# Altium PCB pqxSheetPCB.PcbDoc
Units mm, origin at the board's own origin, x right, y up, seen from the top; angles counter-clockwise.
Board outline 315 x 152 mm, 2 copper layers (Top Layer, Bottom Layer); 119 components, 182 nets, 649 pads, 0 vias.
Unrouted connection lines stored in the file: 432.
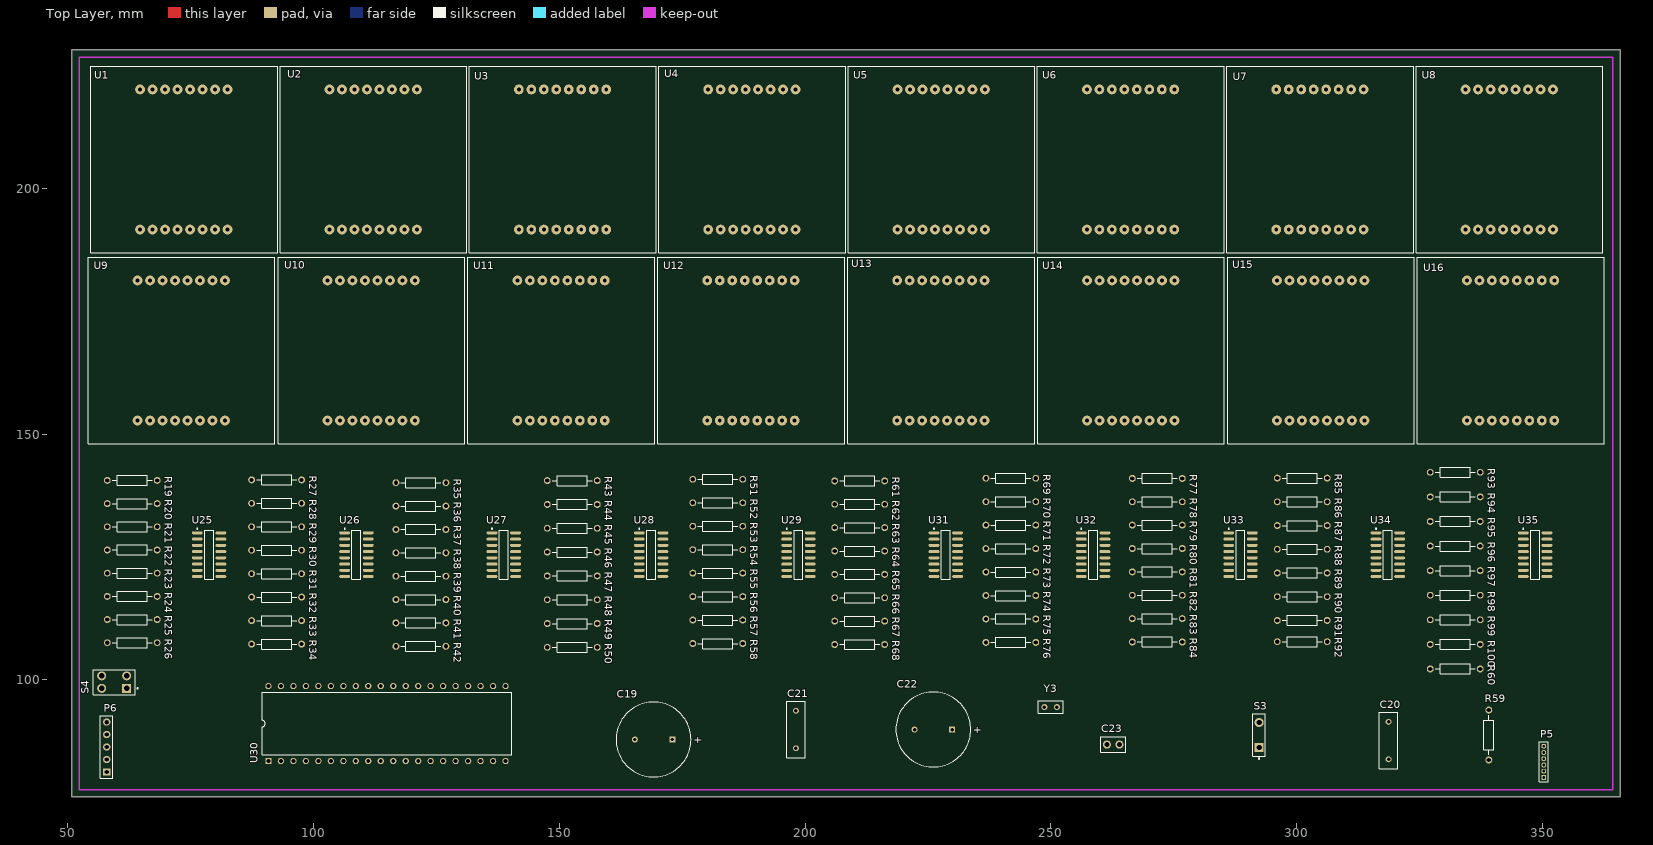
[diagram p0: Top Layer view]
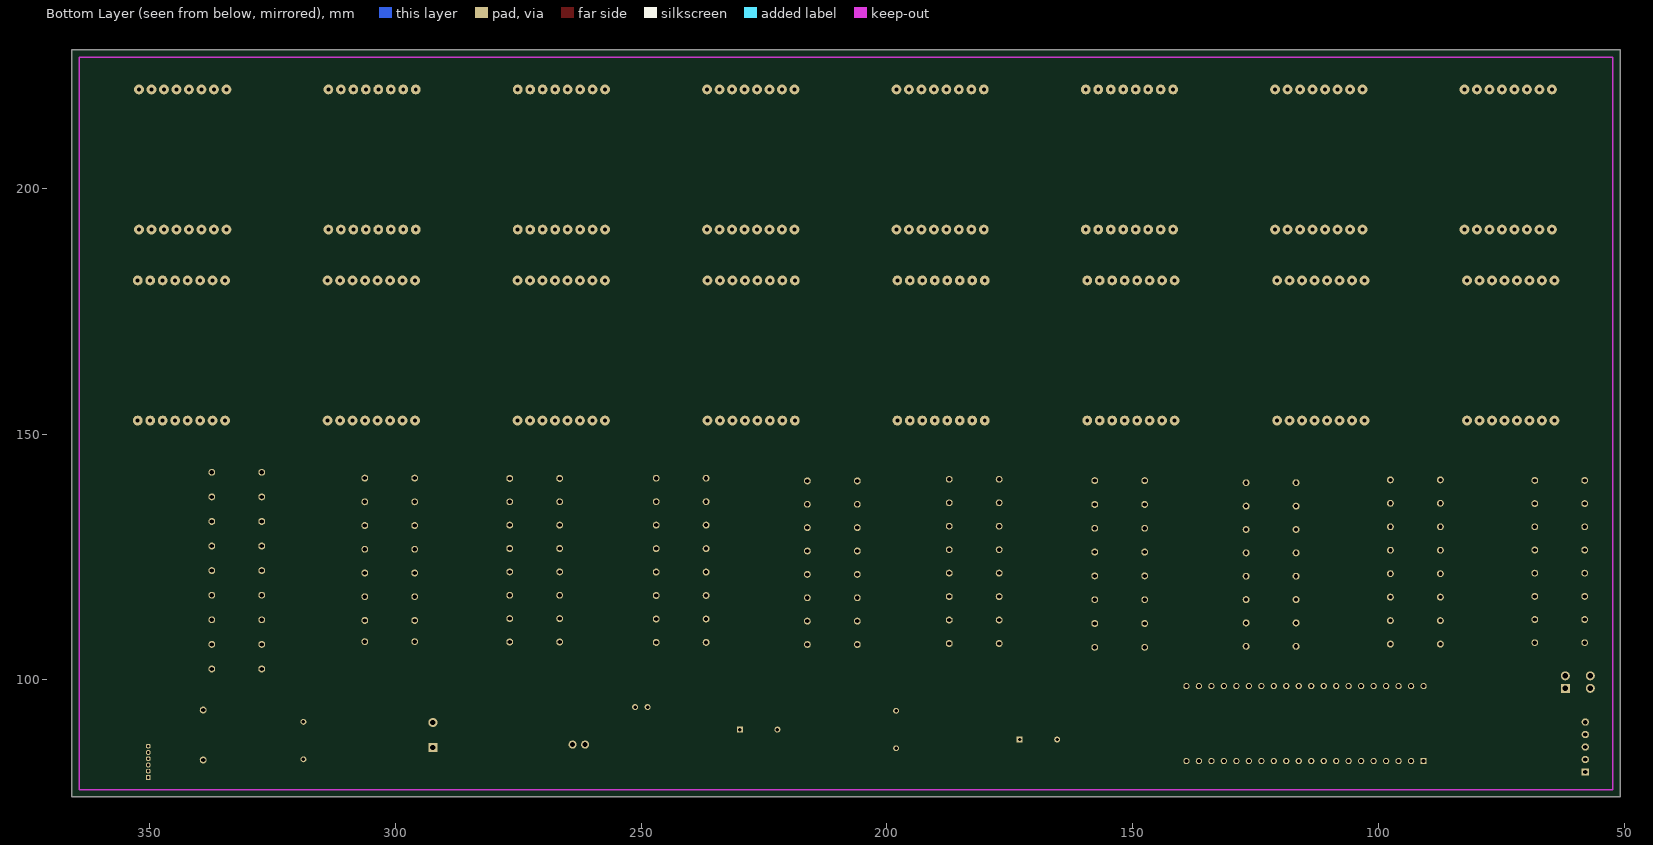
[diagram p1: Bottom Layer view, seen from below]

## Layer stack, top to bottom
Top Layer: signal copper 0.0356
Dielectric: dielectric 0.32, FR-4, Dk 4.8
Bottom Layer: signal copper 0.0356

## Board outline
50.8,76.2 365.8,76.2 365.8,228.2 50.8,228.2

## Design rules (kind name [scope] priority, off if disabled: settings)
Clearance [All] p1: gap=0.3
PolygonConnect [All] p1: connectstyle=Relief reliefconductorwidth=0.254 reliefentries=4 polygonreliefangle="90 Angle"
RoomDefinition pqxProbjSheet [InComponentClass('pqxProbjSheet')] p1: confinementstyle=ConfineIn formatcopy=TRUE lockcomponents=FALSE outline 364.3,226.7 364.3,77.7 52.3,77.7 52.3,226.7
RoutingVias [All] p1: holewidth=0.8 width=1.6 viastyle="Through Hole" minholewidth=0.711 minwidth=1.27 maxholewidth=0.711 maxwidth=1.27
SilkscreenOverComponentPads [All] p1: minsilkscreentomaskgap=0.254
SolderMaskExpansion [All] p1: expansion=0.102
TestPointUsage [All] p1: valid=0 allowmultiple=FALSE
Testpoint [All] p1: side=15 testpointundercomponent=TRUE minsize=1.016 maxsize=2.54 preferedsize=1.524 minholesize=0 maxholesize=1.016 preferedholesize=0.813 testpointgrid=0.025 style=1023 order=0-112345678
Width [All] p1: maxlimit=0.3 minlimit=0.3 preferedwidth=0.3
23 further rules are at their usual default settings.

## Components (designator, comment, footprint, x,y, rotation, side; value= is the part's Value field where it differs from the comment)
C19 "Cap Pol1" RB7.6-15 169.164,87.884 r0 top (schematic designator C1)
C20 "Cap" RAD-0.3 318.664,87.67 r90 top (schematic designator C2)
C21 "Cap" RAD-0.3 198.12,89.916 r90 top (schematic designator C3)
C22 "Cap Pol1" RB7.6-15 226.06,89.916 r0 top (schematic designator C4)
C23 "Cap" VP32-3.2 262.636,86.868 r0 top (schematic designator C5)
P5 "MHDR1X6" MHDR1X6 350.234,80.166 r90 top (schematic designator P1)
P6 "USB" HDR1X5 57.912,81.28 r90 top (schematic designator P2)
R19 "Res2" AXIAL-0.4 63.112,140.592 r0 top (schematic designator R1)
R20 "Res2" AXIAL-0.4 63.112,135.875 r0 top (schematic designator R2)
R21 "Res2" AXIAL-0.4 63.112,131.158 r0 top (schematic designator R3)
R22 "Res2" AXIAL-0.4 63.112,126.441 r0 top (schematic designator R4)
R23 "Res2" AXIAL-0.4 63.112,121.723 r0 top (schematic designator R5)
R24 "Res2" AXIAL-0.4 63.112,117.006 r0 top (schematic designator R6)
R25 "Res2" AXIAL-0.4 63.112,112.289 r0 top (schematic designator R7)
R26 "Res2" AXIAL-0.4 63.112,107.572 r0 top (schematic designator R8)
R27 "Res2" AXIAL-0.4 92.478,140.704 r0 top (schematic designator R9)
R28 "Res2" AXIAL-0.4 92.478,135.932 r0 top (schematic designator R10)
R29 "Res2" AXIAL-0.4 92.478,131.161 r0 top (schematic designator R11)
R30 "Res2" AXIAL-0.4 92.478,126.389 r0 top (schematic designator R12)
R31 "Res2" AXIAL-0.4 92.478,121.618 r0 top (schematic designator R13)
R32 "Res2" AXIAL-0.4 92.478,116.846 r0 top (schematic designator R14)
R33 "Res2" AXIAL-0.4 92.478,112.075 r0 top (schematic designator R15)
R34 "Res2" AXIAL-0.4 92.478,107.303 r0 top (schematic designator R16)
R35 "Res2" AXIAL-0.4 121.828,140.119 r0 top (schematic designator R17)
R36 "Res2" AXIAL-0.4 121.828,135.366 r0 top (schematic designator R18)
R37 "Res2" AXIAL-0.4 121.828,130.612 r0 top (schematic designator R19)
R38 "Res2" AXIAL-0.4 121.828,125.859 r0 top (schematic designator R20)
R39 "Res2" AXIAL-0.4 121.828,121.105 r0 top (schematic designator R21)
R40 "Res2" AXIAL-0.4 121.828,116.352 r0 top (schematic designator R22)
R41 "Res2" AXIAL-0.4 121.828,111.598 r0 top (schematic designator R23)
R42 "Res2" AXIAL-0.4 121.828,106.845 r0 top (schematic designator R24)
R43 "Res2" AXIAL-0.4 152.62,140.547 r0 top (schematic designator R25)
R44 "Res2" AXIAL-0.4 152.62,135.703 r0 top (schematic designator R26)
R45 "Res2" AXIAL-0.4 152.62,130.859 r0 top (schematic designator R27)
R46 "Res2" AXIAL-0.4 152.62,126.015 r0 top (schematic designator R28)
R47 "Res2" AXIAL-0.4 152.62,121.17 r0 top (schematic designator R29)
R48 "Res2" AXIAL-0.4 152.62,116.326 r0 top (schematic designator R30)
R49 "Res2" AXIAL-0.4 152.62,111.482 r0 top (schematic designator R31)
R50 "Res2" AXIAL-0.4 152.62,106.638 r0 top (schematic designator R32)
R51 "Res2" AXIAL-0.4 182.22,140.816 r0 top (schematic designator R33)
R52 "Res2" AXIAL-0.4 182.22,136.044 r0 top (schematic designator R34)
R53 "Res2" AXIAL-0.4 182.22,131.273 r0 top (schematic designator R35)
R54 "Res2" AXIAL-0.4 182.22,126.501 r0 top (schematic designator R36)
R55 "Res2" AXIAL-0.4 182.22,121.73 r0 top (schematic designator R37)
R56 "Res2" AXIAL-0.4 182.22,116.958 r0 top (schematic designator R38)
R57 "Res2" AXIAL-0.4 182.22,112.187 r0 top (schematic designator R39)
R58 "Res2" AXIAL-0.4 182.22,107.415 r0 top (schematic designator R40)
R59 "Res2" AXIAL-0.4 339.058,88.802 r90 top (schematic designator R41)
R60 "Res2" AXIAL-0.4 332.225,102.239 r0 top (schematic designator R42)
R61 "Res2" AXIAL-0.4 211.085,140.488 r0 top (schematic designator R43)
R62 "Res2" AXIAL-0.4 211.085,135.735 r0 top (schematic designator R44)
R63 "Res2" AXIAL-0.4 211.085,130.981 r0 top (schematic designator R45)
R64 "Res2" AXIAL-0.4 211.085,126.228 r0 top (schematic designator R46)
R65 "Res2" AXIAL-0.4 211.085,121.474 r0 top (schematic designator R47)
R66 "Res2" AXIAL-0.4 211.085,116.721 r0 top (schematic designator R48)
R67 "Res2" AXIAL-0.4 211.085,111.967 r0 top (schematic designator R49)
R68 "Res2" AXIAL-0.4 211.085,107.214 r0 top (schematic designator R50)
R69 "Res2" AXIAL-0.4 241.827,141.036 r0 top (schematic designator R51)
R70 "Res2" AXIAL-0.4 241.827,136.264 r0 top (schematic designator R52)
R71 "Res2" AXIAL-0.4 241.827,131.493 r0 top (schematic designator R53)
R72 "Res2" AXIAL-0.4 241.827,126.721 r0 top (schematic designator R54)
R73 "Res2" AXIAL-0.4 241.827,121.95 r0 top (schematic designator R55)
R74 "Res2" AXIAL-0.4 241.827,117.178 r0 top (schematic designator R56)
R75 "Res2" AXIAL-0.4 241.827,112.407 r0 top (schematic designator R57)
R76 "Res2" AXIAL-0.4 241.827,107.635 r0 top (schematic designator R58)
R77 "Res2" AXIAL-0.4 271.621,140.997 r0 top (schematic designator R59)
R78 "Res2" AXIAL-0.4 271.621,136.244 r0 top (schematic designator R60)
R79 "Res2" AXIAL-0.4 271.621,131.49 r0 top (schematic designator R61)
R80 "Res2" AXIAL-0.4 271.621,126.737 r0 top (schematic designator R62)
R81 "Res2" AXIAL-0.4 271.621,121.983 r0 top (schematic designator R63)
R82 "Res2" AXIAL-0.4 271.621,117.23 r0 top (schematic designator R64)
R83 "Res2" AXIAL-0.4 271.621,112.476 r0 top (schematic designator R65)
R84 "Res2" AXIAL-0.4 271.621,107.723 r0 top (schematic designator R66)
R85 "Res2" AXIAL-0.4 301.107,141.064 r0 top (schematic designator R67)
R86 "Res2" AXIAL-0.4 301.107,136.238 r0 top (schematic designator R68)
R87 "Res2" AXIAL-0.4 301.107,131.412 r0 top (schematic designator R69)
R88 "Res2" AXIAL-0.4 301.107,126.586 r0 top (schematic designator R70)
R89 "Res2" AXIAL-0.4 301.107,121.76 r0 top (schematic designator R71)
R90 "Res2" AXIAL-0.4 301.107,116.934 r0 top (schematic designator R72)
R91 "Res2" AXIAL-0.4 301.107,112.108 r0 top (schematic designator R73)
R92 "Res2" AXIAL-0.4 301.107,107.79 r0 top (schematic designator R74)
R93 "Res2" AXIAL-0.4 332.225,142.244 r0 top (schematic designator R75)
R94 "Res2" AXIAL-0.4 332.225,137.243 r0 top (schematic designator R76)
R95 "Res2" AXIAL-0.4 332.225,132.243 r0 top (schematic designator R77)
R96 "Res2" AXIAL-0.4 332.225,127.242 r0 top (schematic designator R78)
R97 "Res2" AXIAL-0.4 332.225,122.241 r0 top (schematic designator R79)
R98 "Res2" AXIAL-0.4 332.225,117.241 r0 top (schematic designator R80)
R99 "Res2" AXIAL-0.4 332.225,112.24 r0 top (schematic designator R81)
R100 "Res2" AXIAL-0.4 332.225,107.24 r0 top (schematic designator R82)
S3 "SW-PB" SPST-2 292.322,88.802 r90 top (schematic designator S1)
S4 "SW-DPST" DPST-4 59.436,99.568 r180 top (schematic designator S2)
U1 "1588BS" 1588BS_16Pin 73.66,205.867 r0 top
U2 "1588BS" 1588BS_16Pin 112.177,205.867 r0 top
U3 "1588BS" 1588BS_16Pin 150.695,205.867 r0 top
U4 "1588BS" 1588BS_16Pin 189.212,205.867 r0 top
U5 "1588BS" 1588BS_16Pin 227.729,205.867 r0 top
U6 "1588BS" 1588BS_16Pin 266.246,205.867 r0 top
U7 "1588BS" 1588BS_16Pin 304.764,205.867 r0 top
U8 "1588BS" 1588BS_16Pin 343.281,205.867 r0 top
U9 "1588BS" 1588BS_16Pin 73.138,167.022 r0 top
U10 "1588BS" 1588BS_16Pin 111.768,167.022 r0 top
U11 "1588BS" 1588BS_16Pin 150.397,167.022 r0 top
U12 "1588BS" 1588BS_16Pin 189.027,167.022 r0 top
U13 "1588BS" 1588BS_16Pin 227.657,167.022 r0 top
U14 "1588BS" 1588BS_16Pin 266.287,167.022 r0 top
U15 "1588BS" 1588BS_16Pin 304.916,167.022 r0 top
U16 "1588BS" 1588BS_16Pin 343.546,167.022 r0 top
U25 "SN74HC594D" D016_N 78.74,125.486 r0 top (schematic designator U17)
U26 "SN74HC594D" D016_N 108.712,125.486 r0 top (schematic designator U18)
U27 "SN74HC594D" D016_N 138.684,125.486 r0 top (schematic designator U19)
U28 "SN74HC594D" D016_N 168.656,125.486 r0 top (schematic designator U20)
U29 "SN74HC594D" D016_N 198.628,125.486 r0 top (schematic designator U21)
U30 "AT89C51" DIP40 113.792,90.932 r90 top (schematic designator U22)
U31 "SN74HC594D" D016_N 228.6,125.486 r0 top (schematic designator U23)
U32 "SN74HC594D" D016_N 258.572,125.486 r0 top (schematic designator U24)
U33 "SN74HC594D" D016_N 288.544,125.486 r0 top (schematic designator U25)
U34 "SN74HC594D" D016_N 318.516,125.486 r0 top (schematic designator U26)
U35 "SN74HC594D" D016_N 348.488,125.486 r0 top (schematic designator U27)
Y3 "XTAL" RAD-0.1 249.936,94.488 r0 top (schematic designator Y1)

## Footprints (in the part's own frame and the unit in brackets; to place one, negate y for a bottom-side part, rotate by r counter-clockwise, add the part's x,y. Pads: shape width x height; smd on the part's side, far side on the other; paste and mask are expansions set on the pad)
1588BS_16Pin [mm]
  round 2 hole 0.8: 1(-8.947,14.25) 2(-6.407,14.25) 3(-3.867,14.25) 4(-1.327,14.25) 5(1.213,14.25) 6(3.753,14.25) 7(6.293,14.25) 8(8.833,14.25) 9(8.833,-14.25) 10(6.293,-14.25) 11(3.753,-14.25) 12(1.213,-14.25) 13(-1.327,-14.25) 14(-3.867,-14.25) 15(-6.407,-14.25) 16(-8.947,-14.25)
  silkscreen extent -19,-19 19,19
AXIAL-0.4 [mm] "Resistor; 2 Leads"
  round 1.4 hole 0.85: 1(-5.08,0) 2(5.08,0)
  silkscreen extent -4.06,-1.02 4.06,1.02
D016_N [mm] "SOIC, 16-Leads, Body 9.9x3.9mm, Pitch 1.27mm, IPC Medium Density"
  oval 2.2x0.6 smd: 1(-2.4,4.445) 2(-2.4,3.175) 3(-2.4,1.905) 4(-2.4,0.635) 5(-2.4,-0.635) 6(-2.4,-1.905) 7(-2.4,-3.175) 8(-2.4,-4.445) 9(2.4,-4.445) 10(2.4,-3.175) 11(2.4,-1.905) 12(2.4,-0.635) 13(2.4,0.635) 14(2.4,1.905) 15(2.4,3.175) 16(2.4,4.445)
  silkscreen extent -2.52,-5 0.9,5.42, body extent -1.95,-4.95 1.95,4.95, height 1.75
DIP40 [mm]
  rect 1.27x1.27 hole 0.8: 1(-7.422,22.99)
  round 1.27 hole 0.8: 2(-7.422,20.45) 3(-7.422,17.91) 4(-7.422,15.37) 5(-7.422,12.83) 6(-7.422,10.29) 7(-7.422,7.75) 8(-7.422,5.21) 9(-7.422,2.67) 10(-7.422,0.13) 11(-7.422,-2.41) 12(-7.422,-4.95) 13(-7.422,-7.49) 14(-7.422,-10.03) 15(-7.422,-12.57) 16(-7.422,-15.11) 17(-7.422,-17.65) 18(-7.422,-20.19) 19(-7.422,-22.73) 20(-7.422,-25.27) 21(7.818,-25.27) 22(7.818,-22.73) 23(7.818,-20.19) 24(7.818,-17.65) 25(7.818,-15.11) 26(7.818,-12.57) 27(7.818,-10.03) 28(7.818,-7.49) 29(7.818,-4.95) 30(7.818,-2.41) 31(7.818,0.13) 32(7.818,2.67) 33(7.818,5.21) 34(7.818,7.75) 35(7.818,10.29) 36(7.818,12.83) 37(7.818,15.37) 38(7.818,17.91) 39(7.818,20.45) 40(7.818,22.99)
  silkscreen extent -6.15,-26.54 6.55,24.26
DPST-4 [mm] "Double-Pole, Single-Throw Switch; 4 Leads"
  rect 1.85x1.85 hole 1.1: 1(-2.54,1.27)
  round 1.85 hole 1.1: 2(-2.54,-1.27) 3(2.54,-1.27) 4(2.54,1.27)
  silkscreen extent -4.88,-2.54 4.28,2.54
HDR1X5 [mm] "Connector; Header; 5 Position"
  rect 1.5x1.5 hole 0.9: 1(0,0)
  round 1.5 hole 0.9: 2(2.54,0) 3(5.08,0) 4(7.62,0) 5(10.16,0)
  silkscreen extent -1.27,-1.27 11.43,1.27
MHDR1X6 [mm] "Connector; Header; 6 Position"
  rect 1x1 hole 0.6: 1(0,0)
  round 1 hole 0.6: 2(1.27,0) 3(2.54,0) 4(3.81,0) 5(5.08,0) 6(6.35,0)
  silkscreen extent -0.9,-0.9 7.25,0.9
RAD-0.1 [mm] "Indicating Instrument; 2 Leads"
  round 1.2 hole 0.7: 1(-1.27,0) 2(1.27,0)
  silkscreen extent -2.54,-1.27 2.54,1.27
RAD-0.3 [mm] "Capacitor; 2 Leads"
  round 1.2 hole 0.7: 1(-3.81,0) 2(3.81,0)
  silkscreen extent -5.72,-1.9 5.71,1.91
RB7.6-15 [mm] "Polarized Capacitor (Radial); 2 Leads"
  rect 1.2x1.2 hole 0.7: 1(3.81,0)
  round 1.2 hole 0.7: 2(-3.81,0)
  silkscreen extent -7.62,-7.62 7.62,7.62
SPST-2 [mm] "Circuit Breaker; 2 Leads"
  rect 1.85x1.85 hole 1.1: 1(-2.54,0)
  round 1.85 hole 1.1: 2(2.54,0)
  silkscreen extent -4.89,-1.27 4.28,1.27
VP32-3.2 [mm] "Capacitor, Ceramic, Thru-Hole, Dipped Radial; Body 5.1 x 3.2 mm (WxT) Pin Spacing 2.54 mm (typ)"
  round 1.65 hole 1: 1(-1.27,0) 2(1.27,0)
  silkscreen extent -2.55,-1.6 2.55,1.6

## Part data
C19 C22: "Polarized Capacitor (Radial)"
C20 C21 C23: "Capacitor"
P5: "Header, 6-Pin"
P6: library part "Header 5H", "Header, 5-Pin, Right Angle"
R19 R20 R21 R22 R23 R24 R25 R26 R27 R28 R29 R30 R31 R32 R33 R34 R35 R36 R37 R38 R39 R40 R41 R42 R43 R44 R45 R46 R47 R48 R49 R50 R51 R52 R53 R54 R55 R56 R57 R58 R59 R60 R61 R62 R63 R64 R65 R66 R67 R68 R69 R70 R71 R72 R73 R74 R75 R76 R77 R78 R79 R80 R81 R82 R83 R84 R85 R86 R87 R88 R89 R90 R91 R92 R93 R94 R95 R96 R97 R98 R99 R100: "Resistor"
S3: "Switch"
S4: "Double-Pole, Single-Throw Switch"
U1 U2 U3 U4 U5 U6 U7 U8 U9 U10 U11 U12 U13 U14 U15 U16: library part 1588BS点阵
U25 U26 U27 U28 U29 U31 U32 U33 U34 U35: "8-Bit Shift Register with Output Registers"
U30: library part 89C51
Y3: "Crystal Oscillator"

## Nets (pads, with @x,y where several pads share a name; then routed paths per layer and width w, separated by ;. In a path a pad name is that pad's centre, name@x,y a point inside that pad or via, vN(x,y) a via of type N, cw(c..) or ccw(c..) an arc to the next point about the centre after c; other vN are vias at no path point)
+5V: C22.1 C23.1 P6.5 S4.1 S4.3
EN/CLR: P5.1
GND: C20.1 C21.1 C22.2 C23.2 P5.3 P6.1 R59.1 U25.8 U25.13 U26.8 U26.13 U27.8 U27.13 U28.8 U28.13 U29.8 U29.13 U30.20 U31.8 U31.13 U32.8 U32.13 U33.8 U33.13 U34.8 U34.13 U35.8 U35.13
NetC19_2: C19.2 R59.2 S3.1 U30.9
NetC20_2: C20.2 U30.18 Y3.2
NetC21_2: C21.2 U30.19 Y3.1
NetR19_1: R19.1 U25.15
NetR20_1: R20.1 U25.1
NetR21_1: R21.1 U25.2
NetR22_1: R22.1 U25.3
NetR23_1: R23.1 U25.4
NetR24_1: R24.1 U25.5
NetR25_1: R25.1 U25.6
NetR26_1: R26.1 U25.7
NetR27_1: R27.1 U26.15
NetR28_1: R28.1 U26.1
NetR29_1: R29.1 U26.2
NetR30_1: R30.1 U26.3
NetR31_1: R31.1 U26.4
NetR32_1: R32.1 U26.5
NetR33_1: R33.1 U26.6
NetR34_1: R34.1 U26.7
NetR35_1: R35.1 U27.15
NetR36_1: R36.1 U27.1
NetR37_1: R37.1 U27.2
NetR38_1: R38.1 U27.3
NetR39_1: R39.1 U27.4
NetR40_1: R40.1 U27.5
NetR41_1: R41.1 U27.6
NetR42_1: R42.1 U27.7
NetR43_1: R43.1 U28.15
NetR44_1: R44.1 U28.1
NetR45_1: R45.1 U28.2
NetR46_1: R46.1 U28.3
NetR47_1: R47.1 U28.4
NetR48_1: R48.1 U28.5
NetR49_1: R49.1 U28.6
NetR50_1: R50.1 U28.7
NetR51_1: R51.1 U29.15
NetR52_1: R52.1 U29.1
NetR53_1: R53.1 U29.2
NetR54_1: R54.1 U29.3
NetR55_1: R55.1 U29.4
NetR56_1: R56.1 U29.5
NetR57_1: R57.1 U29.6
NetR58_1: R58.1 U29.7
NetR60_2: R60.2 U30.31
NetR61_1: R61.1 U31.15
NetR62_1: R62.1 U31.1
NetR63_1: R63.1 U31.2
NetR64_1: R64.1 U31.3
NetR65_1: R65.1 U31.4
NetR66_1: R66.1 U31.5
NetR67_1: R67.1 U31.6
NetR68_1: R68.1 U31.7
NetR69_1: R69.1 U32.15
NetR70_1: R70.1 U32.1
NetR71_1: R71.1 U32.2
NetR72_1: R72.1 U32.3
NetR73_1: R73.1 U32.4
NetR74_1: R74.1 U32.5
NetR75_1: R75.1 U32.6
NetR76_1: R76.1 U32.7
NetR77_1: R77.1 U33.15
NetR78_1: R78.1 U33.1
NetR79_1: R79.1 U33.2
NetR80_1: R80.1 U33.3
NetR81_1: R81.1 U33.4
NetR82_1: R82.1 U33.5
NetR83_1: R83.1 U33.6
NetR84_1: R84.1 U33.7
NetR85_1: R85.1 U34.15
NetR86_1: R86.1 U34.1
NetR87_1: R87.1 U34.2
NetR88_1: R88.1 U34.3
NetR89_1: R89.1 U34.4
NetR90_1: R90.1 U34.5
NetR91_1: R91.1 U34.6
NetR92_1: R92.1 U34.7
NetR93_1: R93.1 U35.15
NetR94_1: R94.1 U35.1
NetR95_1: R95.1 U35.2
NetR96_1: R96.1 U35.3
NetR97_1: R97.1 U35.4
NetR98_1: R98.1 U35.5
NetR99_1: R99.1 U35.6
NetR100_1: R100.1 U35.7
P0.0: U25.12 U26.12 U27.12 U28.12 U29.12 U30.39 U31.12 U32.12 U33.12 U34.12 U35.12
P0.1: U25.11 U26.11 U27.11 U28.11 U29.11 U30.38 U31.11 U32.11 U33.11 U34.11 U35.11
P0.2: U30.37 U35.14
RXD: P5.5 U30.10
SER1: U34.14 U35.9
SER2: U33.14 U34.9
SER3: U32.14 U33.9
SER4: U31.14 U32.9
SER5: U29.14 U31.9
SER6: U28.14 U29.9
SER7: U27.14 U28.9
SER8: U26.14 U27.9
SER9: U25.14 U26.9
STATE: P5.6
TXD: P5.4 U30.11
VCC: C19.1 P5.2 R60.1 S3.2 S4.2 S4.4 U25.10 U25.16 U26.10 U26.16 U27.10 U27.16 U28.10 U28.16 U29.10 U29.16 U31.10 U31.16 U32.10 U32.16 U33.10 U33.16 U34.10 U34.16 U35.10 U35.16
X0: R93.2 U8.16 U16.16
X1: R94.2 U8.15 U16.15
X2: R95.2 U8.11 U16.11
X3: R96.2 U8.6 U16.6
X4: R97.2 U8.10 U16.10
X5: R98.2 U8.4 U16.4
X6: R99.2 U8.3 U16.3
X7: R100.2 U8.13 U16.13
X8: R85.2 U7.16 U15.16
X9: R86.2 U7.15 U15.15
X10: R87.2 U7.11 U15.11
X11: R88.2 U7.6 U15.6
X12: R89.2 U7.10 U15.10
X13: R90.2 U7.4 U15.4
X14: R91.2 U7.3 U15.3
X15: R92.2 U7.13 U15.13
X16: R77.2 U6.16 U14.16
X17: R78.2 U6.15 U14.15
X18: R79.2 U6.11 U14.11
X19: R80.2 U6.6 U14.6
X20: R81.2 U6.10 U14.10
X21: R82.2 U6.4 U14.4
X22: R83.2 U6.3 U14.3
X23: R84.2 U6.13 U14.13
X24: R69.2 U5.16 U13.16
X25: R70.2 U5.15 U13.15
X26: R72.2 U5.6 U5.11 U13.6 U13.11
X28: R73.2 U5.10 U13.10
X29: R74.2 U5.4 U13.4
X30: R75.2 U5.3 U13.3
X31: R76.2 U5.13 U13.13
X32: R61.2 U4.16 U12.16
X33: R62.2 U4.15 U12.15
X34: R63.2 U4.11 U12.11
X35: R64.2 U4.6 U12.6
X36: R65.2 U4.10 U12.10
X37: R66.2 U4.4 U12.4
X38: R67.2 U4.3 U12.3
X39: R68.2 U4.13 U12.13
X40: R51.2 U3.16 U11.16
X41: R52.2 U3.15 U11.15
X42: R53.2 U3.11 U11.11
X43: R54.2 U3.6 U11.6
X44: R55.2 U3.10 U11.10
X45: R56.2 U3.4 U11.4
X46: R57.2 U3.3 U11.3
X47: R58.2 U3.13 U11.13
X48: R43.2 U2.16 U10.16
X49: R44.2 U2.15 U10.15
X50: R45.2 U2.11 U10.11
X51: R46.2 U2.6 U10.6
X52: R47.2 U2.10 U10.10
X53: R48.2 U2.4 U10.4
X54: R49.2 U2.3 U10.3
X55: R50.2 U2.13 U10.13
X56: R35.2 U1.16 U9.16
X57: R36.2 U1.15 U9.15
X58: R37.2 U1.11 U9.11
X59: R38.2 U1.6 U9.6
X60: R39.2 U1.10 U9.10
X61: R40.2 U1.4 U9.4
X62: R41.2 U1.3 U9.3
X63: R42.2 U1.13 U9.13
Y0: R27.2 U9.5 U10.5 U11.5 U12.5 U13.5 U14.5 U15.5 U16.5
Y1: R28.2 U9.2 U10.2 U11.2 U12.2 U13.2 U14.2 U15.2 U16.2
Y2: R29.2 U9.7 U10.7 U11.7 U12.7 U13.7 U14.7 U15.7 U16.7
Y3: R30.2 U9.1 U10.1 U11.1 U12.1 U13.1 U14.1 U15.1 U16.1
Y4: R31.2 U9.12 U10.12 U11.12 U12.12 U13.12 U14.12 U15.12 U16.12
Y5: R32.2 U9.8 U10.8 U11.8 U12.8 U13.8 U14.8 U15.8 U16.8
Y6: R33.2 U9.14 U10.14 U11.14 U12.14 U13.14 U14.14 U15.14 U16.14
Y7: R34.2 U9.9 U10.9 U11.9 U12.9 U13.9 U14.9 U15.9 U16.9
Y8: R19.2 U1.5 U2.5 U3.5 U4.5 U5.5 U6.5 U7.5 U8.5
Y9: R20.2 U1.2 U2.2 U3.2 U4.2 U5.2 U6.2 U7.2 U8.2
Y10: R21.2 U1.7 U2.7 U3.7 U4.7 U5.7 U6.7 U7.7 U8.7
Y11: R22.2 U1.1 U2.1 U3.1 U4.1 U5.1 U6.1 U7.1 U8.1
Y12: R23.2 U1.12 U2.12 U3.12 U4.12 U5.12 U6.12 U7.12 U8.12
Y13: R24.2 U1.8 U2.8 U3.8 U4.8 U5.8 U6.8 U7.8 U8.8
Y14: R25.2 U1.14 U2.14 U3.14 U4.14 U5.14 U6.14 U7.14 U8.14
Y15: R26.2 U1.9 U2.9 U3.9 U4.9 U5.9 U6.9 U7.9 U8.9
pads on no net: P6.2 P6.3 P6.4 R71.2 U25.9 U30.1 U30.2 U30.3 U30.4 U30.5 U30.6 U30.7 U30.8 U30.12 U30.13 U30.14 U30.15 U30.16 U30.17 U30.21 U30.22 U30.23 U30.24 U30.25 U30.26 U30.27 U30.28 U30.29 U30.30 U30.32 U30.33 U30.34 U30.35 U30.36 U30.40

## Keep-outs
Keep-Out Layer:
  lines w0.3: 52.3,77.7 364.3,77.7 364.3,226.7 52.3,226.7 52.3,77.7

## Silkscreen, mask and mechanical layers (free items; w line width, h text height)
Drill Drawing:
  text ".LEGEND" at 370.88,81.28 h1.52
  text "Drill Drawing." at 370.88,78.74 h1.52

## Dimensions
52.3,77.7 to 364.3,77.7 on Mechanical 1
52.3,77.7 to 52.3,226.7 on Mechanical 1

## Text inside footprints (layer, text, board x,y; h text height)
C19: Top Overlay "+" at 177.296,87.147 h1.5
C22: Top Overlay "+" at 234.192,89.179 h1.5